# Altium PCB real man's pcb.PcbDoc
Units mm, origin at the board's own origin, x right, y up, seen from the top; angles counter-clockwise.
Board outline 85 x 80 mm, 4 copper layers (Top Layer, Gnd, DC Power, Bottom Layer), stack 1.782 mm thick; 66 components, 33 nets, 214 pads, 66 vias.
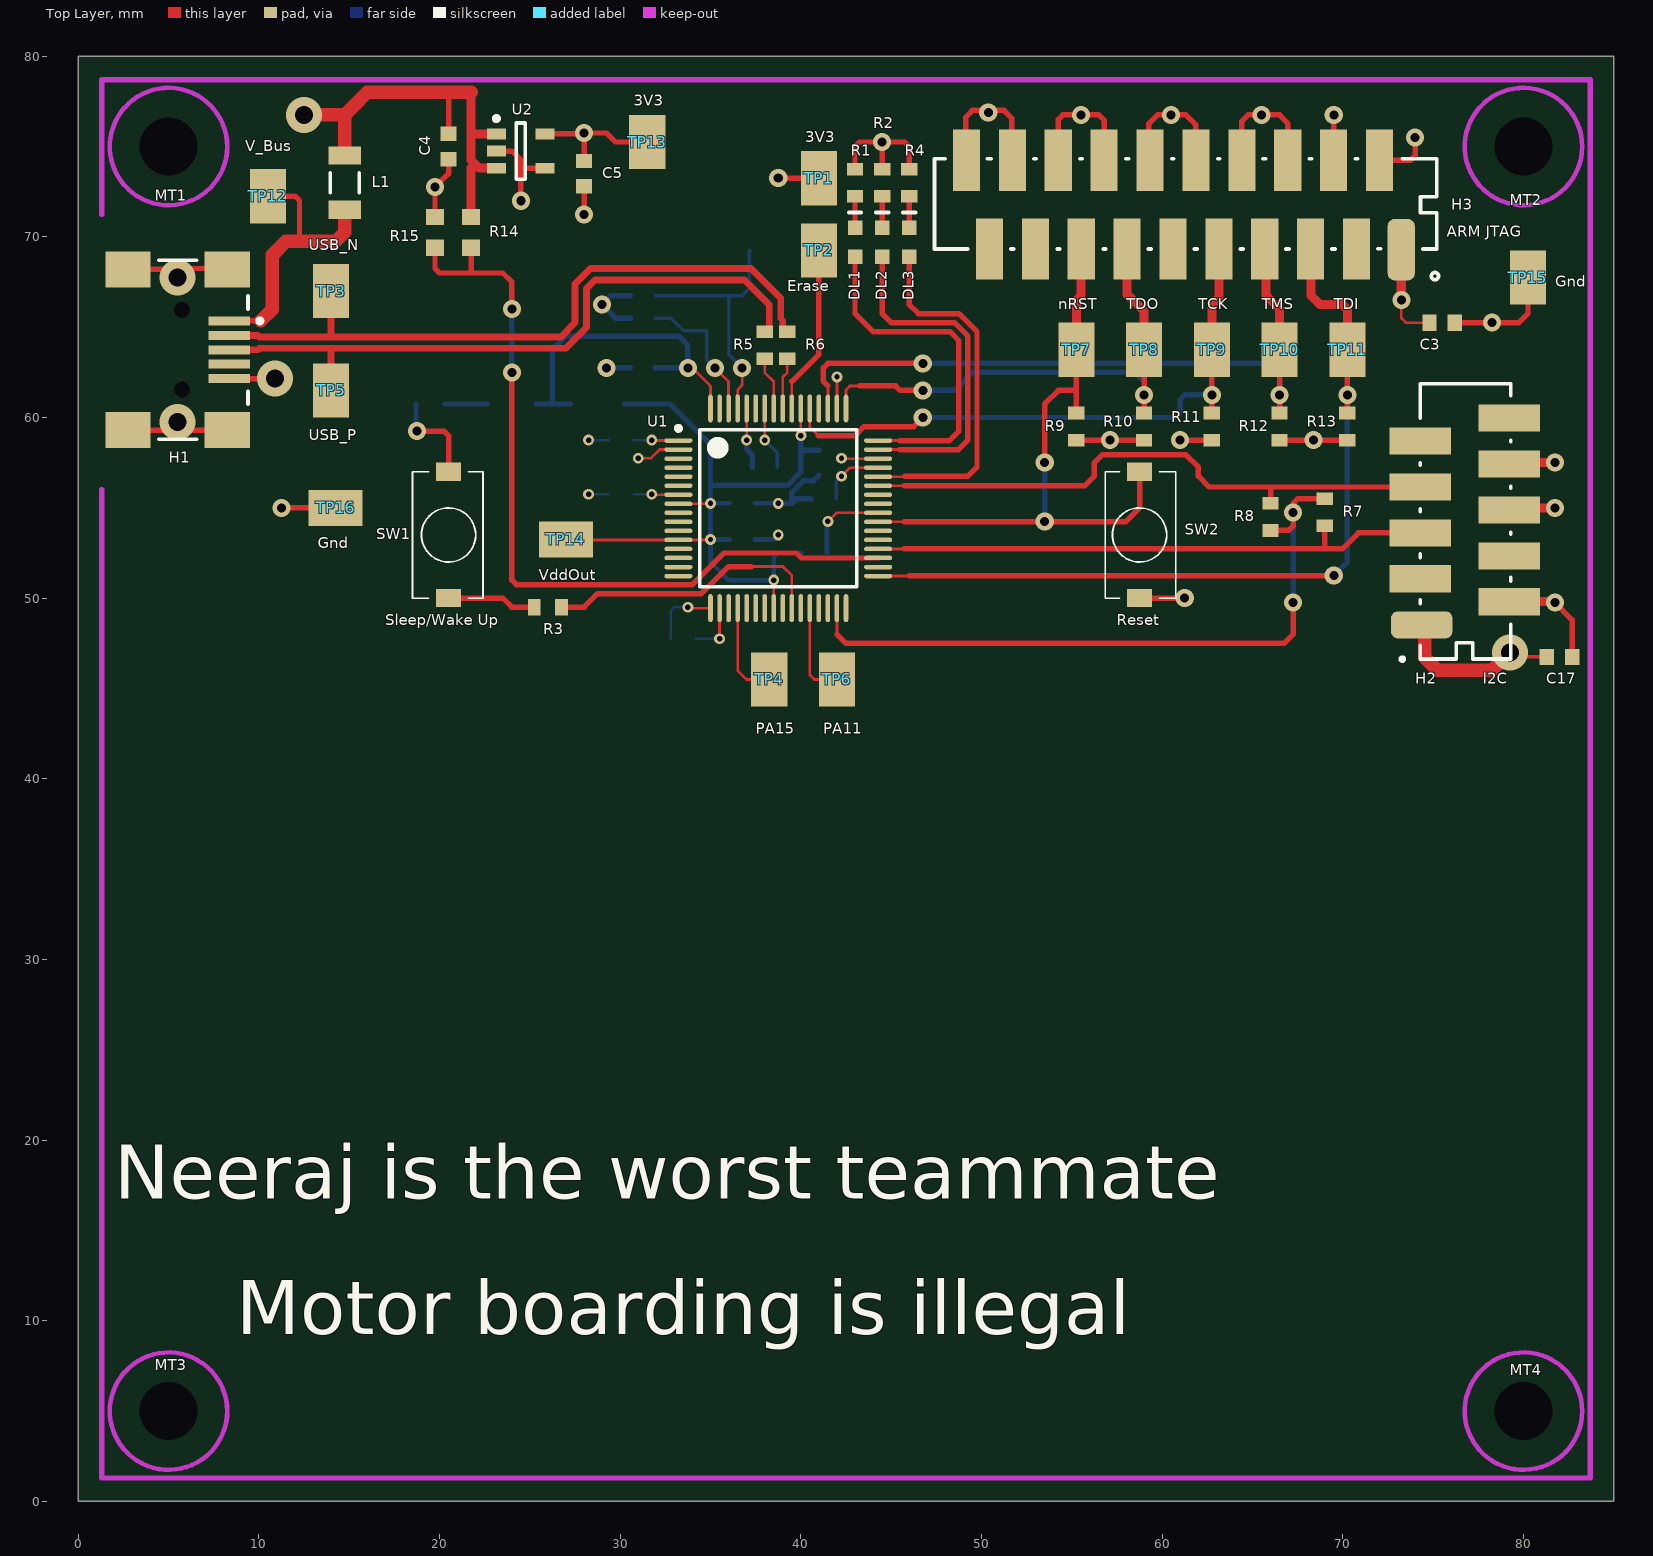
[diagram p0: Top Layer view]
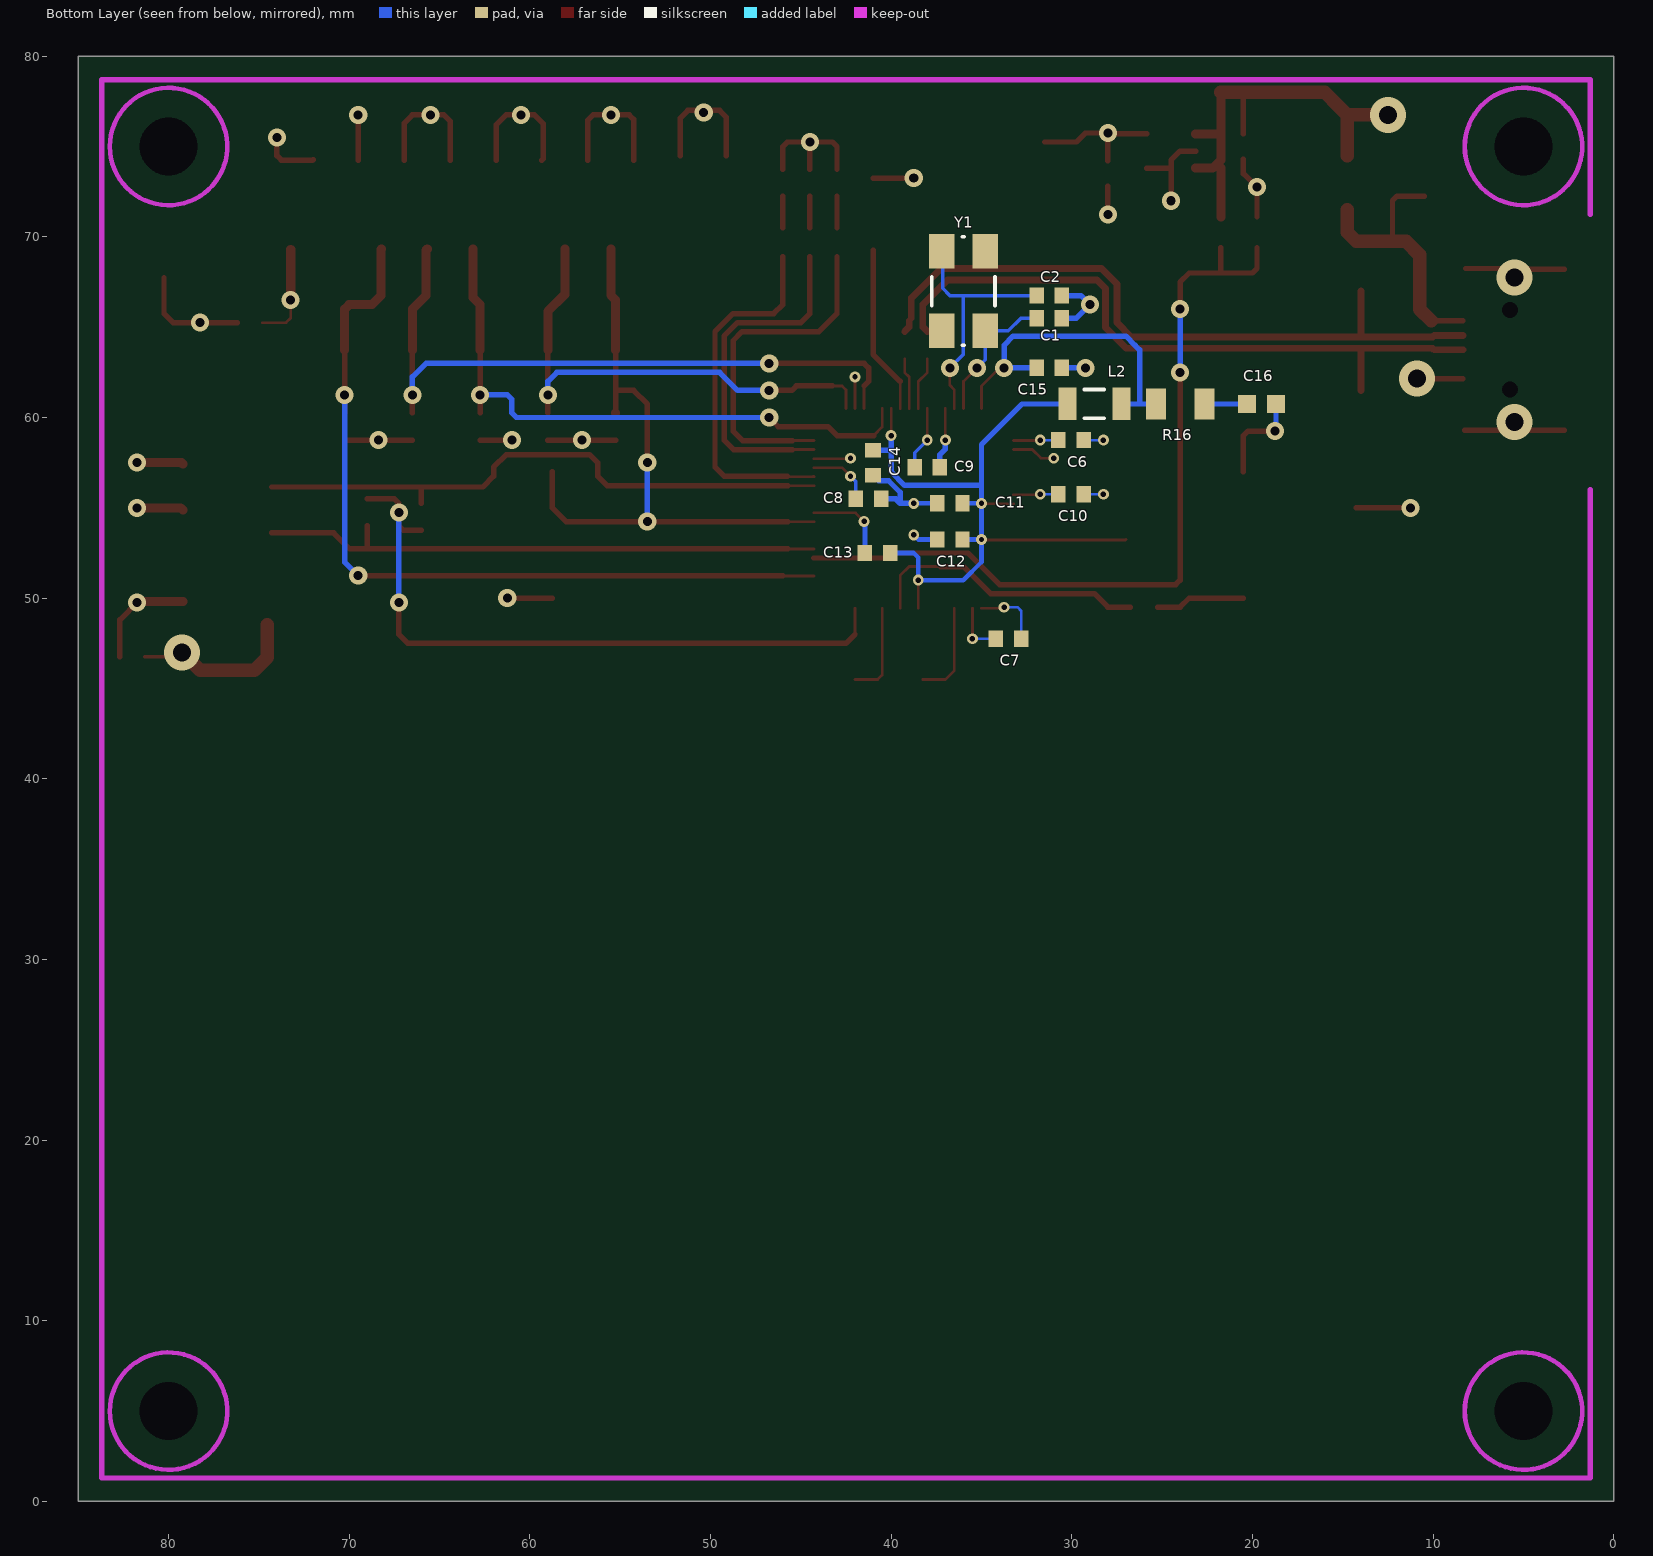
[diagram p1: Bottom Layer view, seen from below]
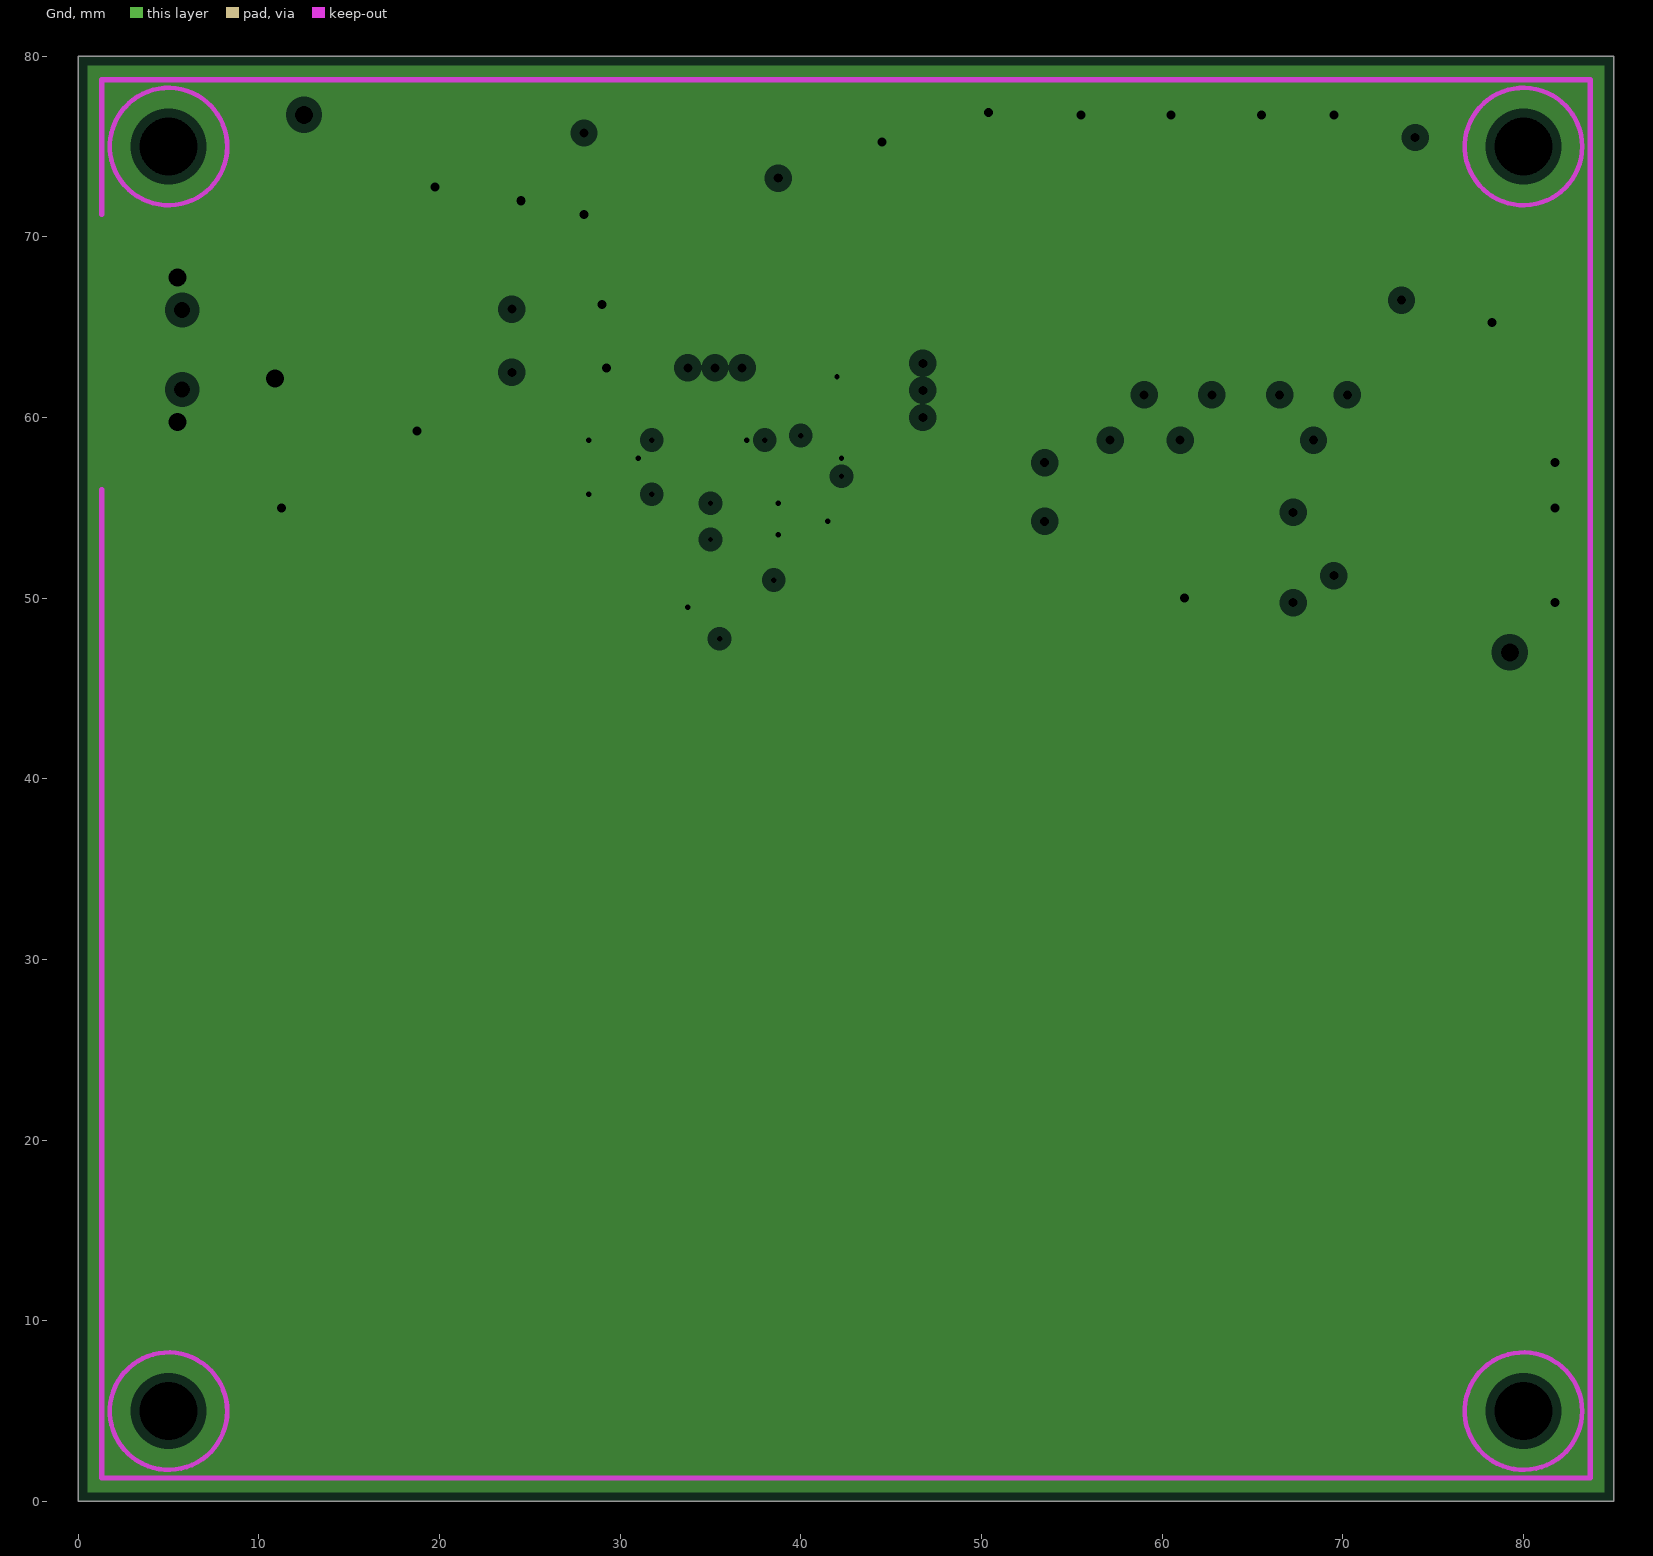
[diagram p2: Gnd, clearances drawn from the general rule]
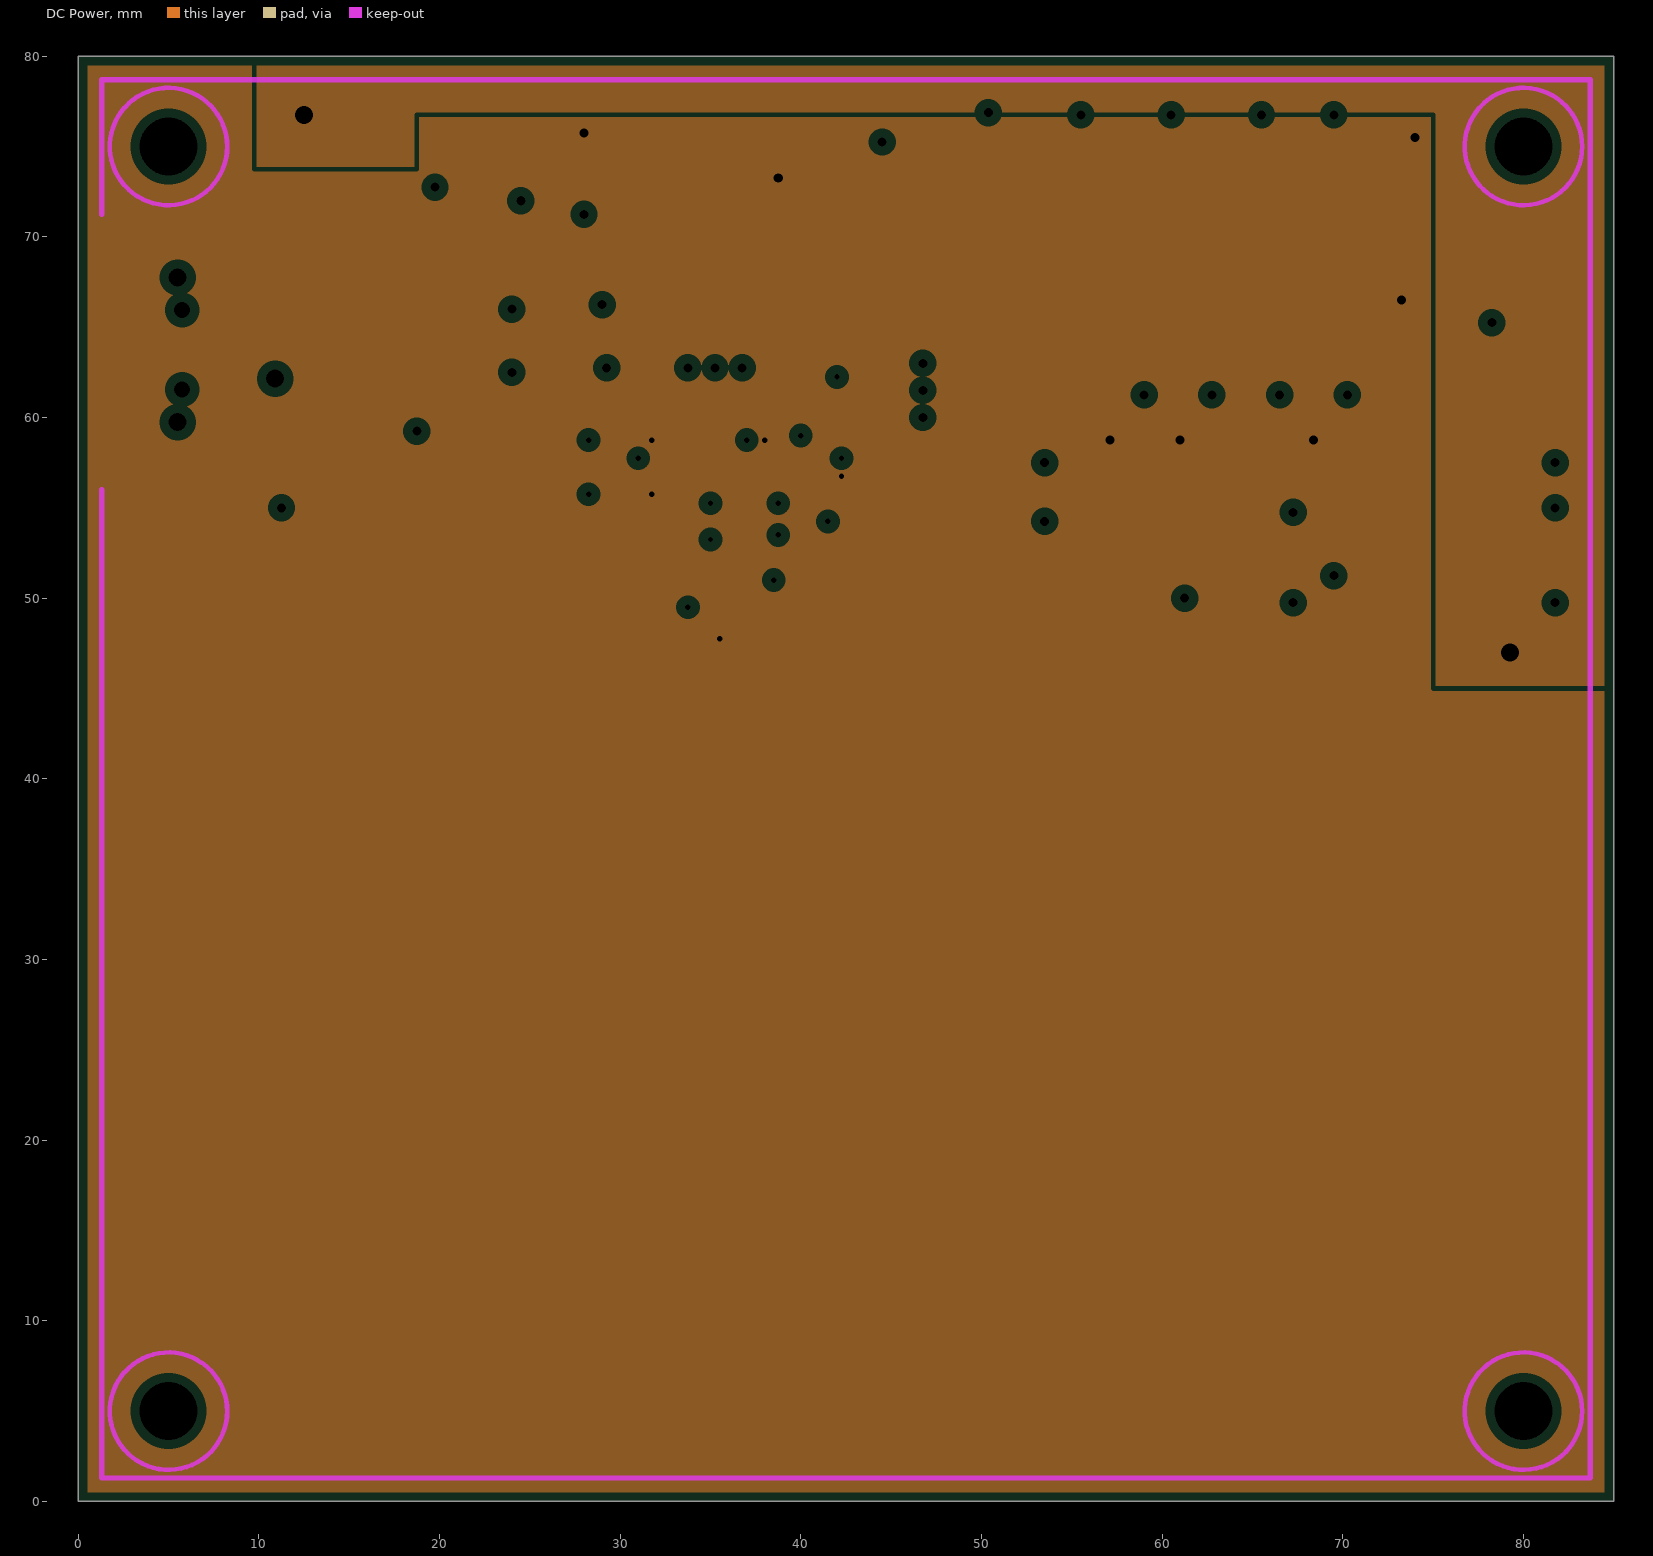
[diagram p3: DC Power, clearances drawn from the general rule]

## Layer stack, top to bottom
Top Solder: solder mask 0.0102, Solder Resist, Dk 3.5
Top Layer: signal copper 0.0356
Dielectric1: prepreg 0.32, FR-4, Dk 4.8
Gnd: plane copper 0.0356, net GND
Dielectric2: core 1, FR-4, Dk 4.8
DC Power: plane copper 0.0356, net (Multiple Nets)
Dielectric3: prepreg 0.32, FR-4, Dk 4.8
Bottom Layer: signal copper 0.0356
Bottom Solder: solder mask 0.0102, Solder Resist, Dk 3.5

## Board outline
0,0 85,0 85,80 0,80

## Design rules (kind name [scope] priority, off if disabled: settings)
Clearance Min_Clearance_Circuit_Labs [All] p1: gap=0.15
DiffPairsRouting [All] p1: maxlimit=0.254 minlimit=0.254 mostfreqgap=0.254 toplayer_minwidth=0.381 toplayer_maxwidth=0.381 toplayer_prefwidth=0.381 bottomlayer_minwidth=0.381 bottomlayer_maxwidth=0.381 bottomlayer_prefwidth=0.381 maxuncoupledlength=12.7
FanoutControl Fanout_BGA [IsBGA] p1 off: bgadir=Out bgaviamode=Centered fanoutstyle=Auto fanoutdirection=Alternating viagrid=0.025 // Fanout_BGA (Default Rule)
HoleSize [All] p1: absolutevalues=TRUE maxlimit=10 minlimit=0.3 maxpercent=80.000 minpercent=20.000
MinimumAnnularRing [All] p1: minimumring=0.1
MinimumSolderMaskSliver [All] p1 off: minsoldermaskwidth=0.25
NetAntennae [All] p1: netantennaetolerance=1
PasteMaskExpansion [All] p1 off: expansion=0.2
PlaneClearance [All] p1: clearance=0.508
PlaneConnect [All] p1: planeconnectstyle=Relief reliefexpansion=0.508 reliefentries=4 reliefconductorwidth=0.254 reliefairgap=0.254
PolygonConnect [All] p1: connectstyle=Relief reliefconductorwidth=0.254 reliefentries=4 polygonreliefangle="90 Angle" airgapwidth=0.254
RoomDefinition "Sam4S Basic Board 5" [InComponentClass('Sam4S Basic Board 5')] p1: confinementstyle=ConfineIn formatcopy=TRUE lockcomponents=FALSE outline -1.3,1.3 83.7,1.3 83.7,78.8 -1.3,78.8
RoomDefinition "Sam4S Power Distribution_5" [InComponentClass('Sam4S Power Distribution_5')] p2: confinementstyle=ConfineIn formatcopy=TRUE lockcomponents=FALSE outline 8.2,46.8 82.45,46.8 82.45,77.55 8.2,77.55
RoutingVias [All] p1: holewidth=0.5 width=1 viastyle="Through Hole" minholewidth=0.3 minwidth=0.6 maxholewidth=1 maxwidth=2
SMDNeckDown [All] p1 off: percent=50.000
SMDToCorner [All] p1: distance=98425
SMDToPlane [All] p1: distance=1968504
SilkToSolderMaskClearance SilkscreenOverComponentPads [IsPad] p1: minsilkscreentomaskgap=0.254 clearancetoexposedcopper=TRUE
SolderMaskExpansion [All] p1: expansion=0.102
ViasUnderSMD [All] p1: allowed=FALSE
Width [All] p1: maxlimit=2 minlimit=0.15 preferedwidth=0.3
21 further rules are at their usual default settings.

## Classes and differential pairs
net class C13_Nets: GND
net class C15_Nets: GND
net class R16_Nets: NetC15_2 NetC16_2 NetR16_1
net class TP4_Nets: NetTP4_1
net class TP6_Nets: NetTP6_1
net class TP15_Nets: GND
net class TP16_Nets: GND
net class C14_Nets: GND VDDOUT
net class TP14_Nets: VDDOUT
net class C3_Nets: +3V3 GND
net class C12_Nets: GND VDDOUT
net class C16_Nets: GND
net class C17_Nets: +5V GND
net class Y1_Nets: NetC1_2 NetC2_2
net class U2_Nets: +3V3 +5V GND
net class U1_Nets: +3V3 ERASE GND LED1 LED2 LED3 NetC1_2 NetC2_2 NetU1_3 NetU1_4 NetU1_5 NetU1_6 NetU1_9 NetU1_10 NetU1_11 NetU1_13 NetU1_14 NetU1_15 NetU1_16 NetU1_19 NetU1_21 NetU1_22 NetU1_23 NetU1_25 NetU1_27 NetU1_29 NetU1_30 NetU1_32 NetU1_34 NetU1_37 NetU1_38 NetU1_41 NetU1_42 NetU1_52 NetU1_59 NetU1_63 NRST SCL SDA TCK TDI TDO TMS "USB DETECT" VDDOUT
net class TP13_Nets: +3V3
net class TP11_Nets: TDI
net class TP10_Nets: TMS
net class TP9_Nets: TCK
net class TP8_Nets: TDO
net class TP7_Nets: NRST
net class TP5_Nets: USB_P
net class TP3_Nets: USB_N
net class TP2_Nets: ERASE
net class TP1_Nets: +3V3
net class SW2_Nets: GND NRST
net class SW1_Nets: GND
net class R15_Nets: GND "USB DETECT"
net class R13_Nets: +3V3 TDI
net class R12_Nets: +3V3 TMS
net class R11_Nets: +3V3 TCK
net class R10_Nets: +3V3 TDO
net class R9_Nets: +3V3 NRST
net class R4_Nets: GND NetDL3_1
net class R2_Nets: GND NetDL2_1
net class R1_Nets: GND NetDL1_1
net class L2_Nets: VDDOUT
net class L1_Nets: VBUS
net class H3_Nets: +3V3 GND NetH3_3 NetH3_11 NetH3_17 NetH3_19 NRST TCK TDI TDO TMS
net class H2_Nets: +5V GND NetH2_3 NetH2_4 NetH2_9 NetH2_10 SCL SDA
net class H1_Nets: GND NetH1_4 USB_N USB_P VBUS
net class DL3_Nets: LED3 NetDL3_1
net class DL2_Nets: LED2 NetDL2_1
net class DL1_Nets: LED1 NetDL1_1
net class C11_Nets: GND
net class C10_Nets: +3V3 GND
net class C9_Nets: GND
net class C8_Nets: GND
net class C7_Nets: +3V3 GND
net class C6_Nets: +3V3 GND
net class C5_Nets: GND
net class C4_Nets: +5V GND
net class C2_Nets: GND NetC2_2
net class C1_Nets: GND NetC1_2
component class "Sam4S Power Distribution_5": C4 C9 C10 C11 C12 C13 C14 C15 C16 L1 L2 R16 TP14 TP15 TP16 U2
component class "Sam4S Basic Board 5": C1 C2 C3 DL1 DL2 DL3 H1 H2 H3 MT1 MT2 MT3 MT4 R2 R3 R4 R6 R7 R11 SW1 SW2 TP3 TP4 TP6 TP7 TP8 TP9 U1 Y1
differential pair USB: +USB_P -USB_N

## Components (designator, comment, footprint, x,y, rotation, side; value= is the part's Value field where it differs from the comment)
C1 "10pF" CAPC1608L 31.25,65.5 r0 bottom
C2 "10pF" CAPC1608L 31.25,66.75 r0 bottom
C3 "100nF" CAPC1608L 75.5,65.25 r180 top
C4 "10uF" CAPC1608L 20.5,75 r270 top
C5 "10uF" CAPC1608L 28,73.5 r270 top
C6 "100nF" CAPC1608L 30.05,58.75 r0 bottom
C7 "100nF" CAPC1608L 33.5,47.75 r0 bottom
C8 "100nF" CAPC1608L 41.25,55.5 r0 bottom
C9 "100nF" CAPC1608L 38,57.25 r0 bottom
C10 "100nF" CAPC1608L 30.05,55.75 r0 bottom
C11 "100nF" CAPC1608L 36.75,55.25 r180 bottom
C12 "100nF" CAPC1608L 36.75,53.25 r180 bottom
C13 "100nF" CAPC1608L 40.75,52.5 r180 bottom
C14 "100nF" CAPC1608L 41,57.5 r90 bottom
C15 "100nF" CAPC1608L 31.25,62.75 r0 bottom
C16 "4.7uF" CAPC1608N 19.5,60.75 r0 bottom
C17 "100nF" CAPC1608L 82,46.75 r180 top
DL1 "Dark Green" WL-SMCW0603 43,70.5 r270 top
DL2 "Yellow" WL-SMCW0603 44.5,70.5 r270 top
DL3 "Red" WL-SMCW0603 46,70.5 r270 top
H1 "JS_USB_MINI_B" USB/SM0.8-6H5 0.5,63.75 r180 top
H2 "I2C" 188275-10 76.75,54.25 r90 top
H3 "ARM JTAG" 188275-20 61.235,71.789 r180 top
L1 "Ferrite Bead" INDC3216L 14.75,73 r90 top
L2 "Ferrite Bead" INDC3216L 28.75,60.75 r0 bottom
MT1 "M3.2 NPTH" MNT-HOLE_3.2mm_NPTH 5,75 r0 top
MT2 "M3.2 NPTH" MNT-HOLE_3.2mm_NPTH 80,75 r0 top
MT3 "M3.2 NPTH" MNT-HOLE_3.2mm_NPTH 5,5 r0 top
MT4 "M3.2 NPTH" MNT-HOLE_3.2mm_NPTH 80,5 r0 top
R1 "62R" RESC1608L 43,73 r90 top
R2 "220R" RESC1608L 44.5,73 r90 top
R3 "2K2" RESC1608L 26,49.5 r180 top
R4 "220R" RESC1608L 46,73 r90 top
R5 "27R" RESC1608L 38,64 r270 top
R6 "27R" RESC1608L 39.25,64 r270 top
R7 "2K2" RESC1608L 69,54.75 r90 top
R8 "2K2" RESC1608L 66,54.5 r270 top
R9 "100K" RESC1608L 55.25,59.5 r270 top
R10 "100K" RESC1608L 59,59.5 r270 top
R11 "100K" RESC1608L 62.75,59.5 r270 top
R12 "100K" RESC1608L 66.5,59.5 r270 top
R13 "100K" RESC1608L 70.25,59.5 r270 top
R14 "27K" RESC1608N 21.75,70.25 r90 top
R15 "47K" RESC1608N 19.75,70.25 r270 top
R16 "1R" RESC3216L 24,60.75 r0 bottom
SW1 "Sleep/Wake Up" KSR211G 20.5,50 r90 top
SW2 "Reset" KSR211G 58.75,57 r270 top
TP1 "3V3" TP_0805 41,73.25 r90 top
TP2 "Erase" TP_0805 41,69.25 r90 top
TP3 "USB_N" TP_0805 14,67 r90 top
TP4 "PA15" TP_0805 38.25,45.5 r90 top
TP5 "USB_P" TP_0805 14,61.5 r90 top
TP6 "PA11" TP_0805 42,45.5 r90 top
TP7 "nRST" TP_0805 55.25,63.75 r90 top
TP8 "TDO" TP_0805 59,63.75 r90 top
TP9 "TCK" TP_0805 62.75,63.75 r90 top
TP10 "TMS" TP_0805 66.5,63.75 r90 top
TP11 "TDI" TP_0805 70.25,63.75 r90 top
TP12 "V_Bus" TP_0805 10.5,72.25 r90 top
TP13 "3V3" TP_0805 31.5,75.25 r270 top
TP14 "VddOut" TP_0805 27,53.25 r0 top
TP15 "Gnd" TP_0805 80.25,67.75 r90 top
TP16 "Gnd" TP_0805 14.25,55 r0 top
U1 "ATSAM4S8BA-ANR" LQFP64_L 38.75,54.975 r0 top
U2 "TLV70233DBVR" SOT95P280X145-5N 24.5,74.75 r0 top
Y1 "18.432MHz" 6.0X3.5-4 36,67 r270 bottom

## Footprints (in the part's own frame and the unit in brackets; to place one, negate y for a bottom-side part, rotate by r counter-clockwise, add the part's x,y. Pads: shape width x height; smd on the part's side, far side on the other; paste and mask are expansions set on the pad)
6.0X3.5-4 [mm] "4 SMD 6.0X3.5 mm No Lead Crystal"
  rect 1.9x1.4 smd: 1(-2.2,-1.2) 2(2.2,-1.2) 3(2.2,1.2) 4(-2.2,1.2)
  silkscreen extent -3,-1.75 3,1.75, body extent -3,-1.75 3,1.75, height 1.2
188275-10 [mm] "MicroMatch Ribbon Connector 10 way"
  rrect50% 1.5x3.4 smd: 1(-5.724,2.385)
  rect 1.5x3.4 smd: 2(-4.445,-2.461) 3(-3.175,2.461) 4(-1.905,-2.461) 5(-0.635,2.461) 6(0.635,-2.461) 7(1.905,2.461) 8(3.175,-2.461) 9(4.445,2.461) 10(5.715,-2.461)
  silkscreen extent -7.74,-2.55 7.62,3.57, body extent -7.62,-2.5 7.64,2.43, height 8.45
188275-20 [mm] "MicroMatch Ribbon Connector 20 way"
  rrect50% 1.5x3.4 smd: 1(-12,2.5)
  rect 1.5x3.4 smd: 2(-10.795,-2.461) 3(-9.525,2.461) 4(-8.255,-2.461) 5(-6.985,2.461) 6(-5.715,-2.461) 7(-4.445,2.461) 8(-3.175,-2.461) 9(-1.905,2.461) 10(-0.635,-2.461) 11(0.635,2.461) 12(1.905,-2.461) 13(3.175,2.461) 14(4.445,-2.461) 15(5.715,2.461) 16(6.985,-2.461) 17(8.255,2.461) 18(9.525,-2.461) 19(10.795,2.461) 20(12.065,-2.461)
  silkscreen extent -14.06,-2.54 13.83,4.16, body extent -13.96,-2.54 13.93,2.46, height 8.45
CAPC1608L [mm] "Chip Capacitor, Body 1.6x0.8mm, IPC High Density"
  rect 0.8x0.9 smd: 1(-0.7,0) 2(0.7,0)
  body extent -0.87,-0.48 0.87,0.48, height 0.85
CAPC1608N [mm] "Chip Capacitor, Body 1.6x0.8mm, IPC Medium Density"
  rect 1x1 smd: 1(-0.8,0) 2(0.8,0)
  body extent -0.87,-0.48 0.87,0.48, height 0.85
INDC3216L [mm] "Chip Inductor, Body 3.2x1.6mm, IPC High Density"
  rect 1x1.8 smd: 1(-1.5,0) 2(1.5,0)
  silkscreen extent -0.55,-0.8 0.55,0.8, body extent -1.75,-0.95 1.75,0.95, height 1.9
KSR211G [mm] "Subminature Tactile Switch in SMT"
  rect 1x1.4 smd: 1(0,0) 2(7,0)
  silkscreen extent 0,-1.9 7,2, body extent 0,-1.9 7,2, height 4.25
LQFP64_L [mm] "Thin QFP, 64-Leads, Body 10x10mm, Pitch 0.5mm, IPC High Density"
  oval 1.55x0.25 smd mask+0.07: 1(-5.525,3.75) 2(-5.525,3.25) 3(-5.525,2.75) 4(-5.525,2.25) 5(-5.525,1.75) 6(-5.525,1.25) 7(-5.525,0.75) 8(-5.525,0.25) 9(-5.525,-0.25) 10(-5.525,-0.75) 11(-5.525,-1.25) 12(-5.525,-1.75) 13(-5.525,-2.25) 14(-5.525,-2.75) 15(-5.525,-3.25) 16(-5.525,-3.75) 33(5.525,-3.75) 34(5.525,-3.25) 35(5.525,-2.75) 36(5.525,-2.25) 37(5.525,-1.75) 38(5.525,-1.25) 39(5.525,-0.75) 40(5.525,-0.25) 41(5.525,0.25) 42(5.525,0.75) 43(5.525,1.25) 44(5.525,1.75) 45(5.525,2.25) 46(5.525,2.75) 47(5.525,3.25) 48(5.525,3.75)
  oval 0.25x1.55 smd mask+0.07: 17(-3.75,-5.525) 18(-3.25,-5.525) 19(-2.75,-5.525) 20(-2.25,-5.525) 21(-1.75,-5.525) 22(-1.25,-5.525) 23(-0.75,-5.525) 24(-0.25,-5.525) 25(0.25,-5.525) 26(0.75,-5.525) 27(1.25,-5.525) 28(1.75,-5.525) 29(2.25,-5.525) 30(2.75,-5.525) 31(3.25,-5.525) 32(3.75,-5.525) 49(3.75,5.525) 50(3.25,5.525) 51(2.75,5.525) 52(2.25,5.525) 53(1.75,5.525) 54(1.25,5.525) 55(0.75,5.525) 56(0.25,5.525) 57(-0.25,5.525) 58(-0.75,5.525) 59(-1.25,5.525) 60(-1.75,5.525) 61(-2.25,5.525) 62(-2.75,5.525) 63(-3.25,5.525) 64(-3.75,5.525)
  silkscreen extent -5.65,-4.35 4.35,4.55, body extent -5,-5 5,5, height 1.6
MNT-HOLE_3.2mm_NPTH [mm] "Mounting Hole 3.2mm non plated"
  round 0 hole 3.2 unplated: 1(0,0)
  Keep-Out Layer circle w0.254: c0,0 r3.25
RESC1608L [mm] "Chip Resistor, Body 1.6x0.8mm, IPC High Density"
  rect 0.7x0.9 smd: 1(-0.75,0) 2(0.75,0)
  body extent -0.85,-0.48 0.85,0.48, height 0.9
RESC1608N [mm] "Chip Resistor, Body 1.6x0.8mm, IPC Medium Density"
  rect 0.9x1 smd: 1(-0.85,0) 2(0.85,0)
  body extent -0.85,-0.48 0.85,0.48, height 0.6
RESC3216L [mm] "Chip Resistor, Body 3.1x1.6mm, IPC High Density"
  rect 1.1x1.7 smd: 1(-1.35,0) 2(1.35,0)
  body extent -1.68,-0.87 1.68,0.87, height 2.54
SOT95P280X145-5N [mm] "SOT23, 5-Leads, Body 2.90x2.80mm, Pitch 0.95mm, IPC Medium Density"
  rect 1.05x0.6 smd: 1(-1.35,0.95) 2(-1.35,0) 3(-1.35,-0.95) 4(1.35,-0.95) 5(1.35,0.95)
  silkscreen extent -1.47,-1.55 0.25,1.92, body extent -0.87,-1.52 0.87,1.53, height 1.45
TP_0805 [mm] "TestPoint SMD"
  rect 3x2 smd: 1(0,0)
  body extent -1.5,-1 1.5,1.1, height 1.4
USB/SM0.8-6H5 [mm] "Connector; USB2.0, Type B, SM; 5 Position; Right Angle"
  rect 2.3x0.5 smd mask+0.07: 1(-7.85,-1.6) 2(-7.85,-0.8) 3(-7.85,0) 4(-7.85,0.8) 5(-7.85,1.6)
  rect 2.5x2 smd: 6(-7.75,4.45) 7(-2.25,4.45) 8(-7.75,-4.45) 9(-2.25,-4.45)
  round 0.6 hole 0.9 unplated: MH1(-5.25,2.2) MH2(-5.25,-2.2)
  silkscreen extent -9.68,-4.95 -3.95,4.95, body extent -8.9,-4.95 0.7,4.95, height 3.9
WL-SMCW0603 [mm] "2.4 x 0.8 x 0.7mm LED"
  rect 0.8x0.8 smd: 1(0,0) 2(1.6,0)
  silkscreen extent -0.85,-0.35 -0.85,0.35

## Part data
C1 C2: library part CC_10pF_0603, "CAP CER 10pF COG/NPO 50V 0603"
C3 C6 C7 C8 C9 C10 C11 C12 C13 C14 C15 C17: library part CC_100nF_0603, "CAP CER 100nF X7R +-10% 50V 0603"
C4 C5: library part CC_10uF_0603, "CAP CER 10UF X5R +-20% 10V 0603"
C16: library part CC_4.7uF_0603, "CAP CER 4.7uF X5R +-20%  10V 0603"
DL1: library part DL_150060GS75000, "LED Dk Green 430mcd 0603 SMD"
DL2: library part DL_150060YS75000, "LED Yellow 120mcd 0603 SMD"
DL3: library part DL_150060RS75000, "LED Red 250mcd 0603 SMD"
H1: library part JS_USB_MINI_B_SMT, "USB 2.0, Right Angle, SMT, B Type, Receptacle, 5 Position,"
H2: library part JB_HDR_IDC_5X2_VERT, "IDC Header, 1,27mm, 10-Pin, Vert, SMT"
H3: library part JB_HDR_IDC_10X2_VERT, "IDC Header, 1,27mm, 20-Pin, Vert, SMT"
L1 L2: library part IN_Ferrite-Bead, "Ferrite Bead, Rdc 0.3R, Z100MHZ 600R, Imax 1A, SMD 1206"
MT1 MT2 MT3 MT4: library part MC_M3.2_HOLE, "Fixing M3.2 Mount Hole NPTH"
R1: library part RS_62R, "RES 62 OHM 1/10W 5% 0603 SMD"
R2 R4: library part RS_220R, "RES 220 OHM 1/10W 5% 0603 SMD"
R3 R7 R8: library part RS_2K2, "RES 2.2K OHM 1/10W 5% 0603 SMD"
R5 R6: library part RS_27R, "RES 27 OHM 1/10W 5% 0603 SMD"
R9 R10 R11 R12 R13: library part RS_100K, "RES 100K OHM 1/10W 5% 0603 SMD"
R14: library part RS_27K, "RES 27K OHM 1/10W 5% 0603 SMD"
R15: library part RS_47K, "RES 47.0K OHM 1/10W 5% 0603 SMD"
R16: library part RT_1R, "RES 1R OHM 1/4W 5% 1206 SMD"
SW1 SW2: library part "WS_KSR211G LFS", "SWITCH TACTILE SPST-NO SMD"
TP1 TP2 TP3 TP4 TP5 TP6 TP7 TP8 TP9 TP10 TP11 TP12 TP13 TP14 TP15 TP16: library part TP_0805, "Test Point 2.0X0.9X1.2mm SMD"
U1: library part SE_ATSAM4S16BA-MU, "IC MCU 32BIT 512KB FLASH 64LQFP"
U2: library part SV_TLV70233DBVR, "IC REG LDO 3.3V 0.3A SOT23-5"
Y1: library part XT_CRYSTAL_18.432MHz_13pF, "18.432 MHZ 4PF  6.0X3.5mm SMD"

## Via types
v1: diameter 1, hole 0.5, Top Layer to Bottom Layer, 42 vias
v2: diameter 0.6, hole 0.3, Top Layer to Bottom Layer, 19 vias
v3: diameter 2, hole 1, Top Layer to Bottom Layer, 5 vias

## Nets (pads, with @x,y where several pads share a name; then routed paths per layer and width w, separated by ;. In a path a pad name is that pad's centre, name@x,y a point inside that pad or via, vN(x,y) a via of type N, cw(c..) or ccw(c..) an arc to the next point about the centre after c; other vN are vias at no path point)
+3V3: C3.2 C5.1 C6.2 C7.2 C8.2 C9.2 C10.2 H3.1 H3.2 R9.2 R10.2 R11.2 R12.2 R13.2 TP1.1 TP13.1 U1.1 U1.7 U1.18 U1.45 U1.58 U2.5 | length 42.7
  Top Layer w0.15: v2(31.75,55.75) 31.775,55.725 U1.7 ; v2(31.75,58.75) 31.775,58.725 U1.1 ; v2(35.5,47.75) U1.18 ; v2(38,58.75) U1.58 ; v2(42.25,56.75) 42.725,57.225 U1.45 ; v1@73.235,66.515 73.235,65.515 73.5,65.25 C3.2
  Top Layer w0.3: U2.5 27.95,75.7 v1(28,75.75) ; C5.1 v1(28,75.75) ; TP13.1 29.75,75.25 29.25,75.75 v1(28,75.75) ; v1(38.75,73.25) TP1.1 ; R9.2 v1(57.125,58.75) R10.2 ; v1(61,58.75) R11.2 ; R12.2 v1(68.375,58.75) R13.2 ; H3.2@72,74.28 H3.2 73.75,74.25 74,74.5 v1(74,75.5) ; H3.1 H3.1@73.274,69.25
  Top Layer w0.5: v1@73.235,66.515 H3.1
  Bottom Layer w0.15: C10.2 v2(31.75,55.75) ; C6.2 v2(31.75,58.75) ; C7.2 v2(35.5,47.75)
  Bottom Layer w0.2: v2(38,58.75) 38.7,58.05 C9.2 ; C8.2 41.95,56.45 v2(42.25,56.75)
  other v1: 73.25,66.5
+5V: C4.1 C17.2 H2.1 L1.2 R14.2 U2.1 U2.3 | length 33.7
  Top Layer w0.2: v3(79.25,47) 79.5,46.75 C17.2
  Top Layer w0.3: C4.1 20.5,78
  Top Layer w0.5: R14.2 21.75,73.8 21.975,74.025 ; 21.75,78 21.75,75.75 ; U2.3 22.2,73.8 21.975,74.025 ; U2.1 21.8,75.7 21.75,75.75 ; 21.75,75.75 21.75,74.25 21.975,74.025
  Top Layer w0.75: v3(12.5,76.75) 14.75,76.75 ; L1.2 14.75,76 14.75,76.75 ; 21.75,78 20.5,78 16,78 15.25,77.25 14.75,76.75 ; H2.1@74.526,48.526 74.526,46.724 75.25,46 78.25,46 v3(79.25,47)
  Bottom Layer w0.75: v3(79.25,47) v3@79.5,47
ERASE: TP2.1 U1.55 | length 9.4
  Top Layer w0.15: U1.55 39.5,62
  Top Layer w0.3: 39.5,62 41,63.5 TP2.1
GND: C1.1 C2.1 C3.1 C4.2 C5.2 C6.1 C7.1 C8.1 C9.1 C10.1 C11.1 C12.1 C13.1 C14.1 C15.1 C16.1 C17.1 H1.5 H1.6 H1.7 H1.8 H1.9 H2.2 H2.6 H2.8 H3.4 H3.6 H3.8 H3.10 H3.12 H3.14 H3.16 H3.18 H3.20 R1.2 R2.2 R4.2 R15.1 SW1.2 SW2.2 TP15.1 TP16.1 U1.2 U1.17 U1.40 U1.46 U1.50 U1.60 U2.2 U2.4 | length 123.4
  Top Layer w0.15: v2(31,57.75) 31.715,57.75 32.19,58.225 U1.2 ; v2(33.75,49.5) 33.8,49.45 U1.17 ; v2(37,58.75) U1.60 ; v2(41.5,54.25) 41.975,54.725 U1.40 ; U1.50 v2(42,62.25) ; v2(42.25,57.75) 42.275,57.725 U1.46
  Top Layer w0.3: H1.7 4.8,59.3 5.25,59.75 v3(5.5,59.75) 5.75,59.75 6.2,59.3 H1.6 ; H1.9 5.05,68.2 v3(5.5,67.75) 6,68.25 H1.8@8.2,68.25 ; H1.5 v3(10.9,62.15) ; v1(11.25,55) TP16.1 ; v1(18.75,59.25) 20.25,59.25 20.5,59 SW1.2 ; R15.1 v1(19.75,72.75) 20.5,73.5 C4.2 ; U2.2 24,74.75 24.5,74.25 24.5,73.75 ; v1(24.5,72) 24.5,73.75 ; U2.4 24.55,73.8 24.5,73.75 ; v1(28,71.25) C5.2 ; R1.2 43,75 43.25,75.25 v1(44.5,75.25) ; R2.2 v1(44.5,75.25) ; R4.2 46,75 45.75,75.25 v1(44.5,75.25) ; H3.20@49.13,74.5 49.13,76.63 49.5,77 v1@50.375,77 ; v1(50.375,76.875) v1@50.375,77 ; H3.18@51.67,74.5 51.67,76.58 51.25,77 v1@50.375,77 ; H3.16 54.25,76.5 54.5,76.75 v1(55.5,76.75) 56.5,76.75 56.79,76.46 H3.14 ; SW2.2 v1(61.25,50) ; H3.12 59.25,74.33 59.25,76.25 59.75,76.75 v1(60.5,76.75) 61.32,76.75 61.87,76.2 H3.10 ; H3.8 64.41,76.41 64.75,76.75 v1(65.5,76.75) 66.5,76.75 66.95,76.3 H3.6 ; H3.4 69.49,76.74 v1(69.5,76.75) ; C3.1 v1(78.25,65.25) 79.75,65.25 80.25,65.75 TP15.1 ; v1@81.695,49.805 82.7,48.8 C17.1
  Top Layer w0.5: H2.2 v1@81.695,49.805 ; H2.6 79.326,55 v1(81.75,55) ; H2.8 79.286,57.5 v1(81.75,57.5)
  Bottom Layer w0.15: v2(28.25,55.75) C10.1 ; v2(28.25,58.75) C6.1 ; C7.1 32.8,49.3 33,49.5 v2(33.75,49.5)
  Bottom Layer w0.254: C12.1 38.5,53.25 v2(38.75,53.5) ; C11.1 v2(38.75,55.25) ; C13.1 41.45,54.2 v2(41.5,54.25)
  Bottom Layer w0.3: C16.1 18.7,59.3 v1(18.75,59.25) ; v1(29.25,62.75) C15.1 ; C1.1 29.75,65.5 v1(29,66.25) 29.5,66.75 C2.1 ; v2(37,58.75) 37,58.25 37.3,57.95 C9.1 ; v2(38.75,55.25) 39.5,55.25 ; C8.1 39.75,55.5 39.5,55.25 ; C14.1 40.7,56.5 40.136,56.5 39.5,55.864 39.5,55.25
  other v1: 81.75,49.75
LED1: DL1.2 U1.48 | length 19.2
  Top Layer w0.15: U1.48 45.475,58.725
  Top Layer w0.3: DL1.2 43,65.75 44,64.75 48.25,64.75 48.75,64.25 48.75,59.25 48.225,58.725 45.475,58.725
LED2: DL2.2 U1.47 | length 19.4
  Top Layer w0.15: U1.47 45.475,58.225
  Top Layer w0.3: DL2.2 44.5,65.75 45,65.25 48.5,65.25 49.25,64.5 49.25,58.75 48.725,58.225 45.475,58.225
LED3: DL3.2 U1.44 | length 20.2
  Top Layer w0.15: U1.44@44.3,56.75 U1.44 45.725,56.725 45.75,56.75
  Top Layer w0.3: 45.75,56.75 49.25,56.75 49.75,57.25 49.75,64.75 48.75,65.75 46.5,65.75 46,66.25 DL3.2
NetC1_2: C1.2 U1.62 Y1.3 | length 7.9
  Top Layer w0.15: v1(35.25,62.75) 36,62 U1.62
  Bottom Layer w0.2: C1.2 32.816,65.5 33.516,64.8 Y1.3 34.8,63.2 v1(35.25,62.75)
NetC2_2: C2.2 U1.61 Y1.1 | length 14.2
  Top Layer w0.15: U1.61 36.5,61.535 36.75,61.785 v1(36.75,62.75)
  Bottom Layer w0.2: C2.2 36,66.75 ; v1(36.75,62.75) 36,63.5 36,66.75 ; Y1.1 37.15,69.25 37.15,67.15 36.75,66.75 36,66.75
NetC15_2: C15.2 L2.1 R16.2 U1.64 | length 18.9
  Top Layer w0.15: v1(33.75,62.75) 34,62.75 35,61.75 U1.64
  Bottom Layer w0.3: R16.2 26.25,60.75 ; L2.1 26.25,60.75 ; C15.2 v1(33.75,62.75) 33.75,64 33.25,64.5 27,64.5 26.5,64 26.25,63.75 26.25,60.75
NetC16_2: C16.2 R16.1 | length 2.4
  Bottom Layer w0.3: C16.2 R16.1
NetDL1_1: DL1.1 R1.1 | length 1.8
  Top Layer w0.3: DL1.1 R1.1
NetDL2_1: DL2.1 R2.1 | length 1.8
  Top Layer w0.3: DL2.1 R2.1
NetDL3_1: DL3.1 R4.1 | length 1.8
  Top Layer w0.3: DL3.1 R4.1
NetR3_1: R3.1 U1.26 | length 15.7
  Top Layer w0.15: 37.25,51.75 39,51.75 39.5,51.25 U1.26
  Top Layer w0.3: R3.1 28,49.5 28.75,50.25 34.5,50.25 36,51.75 37.25,51.75
NetR3_2: R3.2 SW1.1 | length 5
  Top Layer w0.3: SW1.1 23.5,50 24,49.5 R3.2
NetR5_2: R5.2 U1.57 | length 3
  Top Layer w0.15: R5.2 38,62.5 38.5,62 U1.57
NetR6_2: R6.2 U1.56 | length 2.9
  Top Layer w0.15: U1.56 39,62.25 39.25,62.5 R6.2
NetR7_2: R7.2 R8.2 U1.31 | length 38.3
  Top Layer w0.15: 42,48 U1.31
  Top Layer w0.3: 42,48 42.5,47.5 66.75,47.5 67.25,48 v1(67.25,49.75) ; R8.2 67,53.75 67.25,54 v1(67.25,54.75) 67.25,55.25 67.5,55.5 R7.2
  Bottom Layer w0.3: v1(67.25,49.75) v1(67.25,54.75)
NetTP4_1: TP4.1 U1.20 | length 5.4
  Top Layer w0.15: U1.20 36.5,46 37,45.5 TP4.1
NetTP6_1: TP6.1 U1.28 | length 5.3
  Top Layer w0.15: U1.28 40.5,45.75 40.75,45.5 TP6.1
NRST: H3.15 R9.1 SW2.1 TP7.1 U1.39 | length 34.5
  Top Layer w0.15: U1.39 45.725,54.225
  Top Layer w0.3: 45.725,54.225 57.975,54.225 58.75,55 SW2.1 ; v1(53.5,57.5) 53.5,60.75 54.25,61.5 55.25,61.5 ; R9.1 55.25,61.5 ; TP7.1 55.25,61.5
  Top Layer w0.5: TP7.1 55.25,66.5 55.52,66.77 H3.15
  Bottom Layer w0.3: v1(53.5,54.25) v1(53.5,57.5)
SCL: H2.5 R7.1 U1.36 | length 31.7
  Top Layer w0.15: U1.36 45.725,52.725
  Top Layer w0.3: 45.725,52.725 69,52.725 ; R7.1 69,52.725 ; H2.5 70.865,53.615 69.975,52.725 69,52.725
SDA: H2.7 R8.1 U1.43 | length 33.1
  Top Layer w0.15: U1.43 45.725,56.225
  Top Layer w0.3: 45.725,56.225 55.725,56.225 56.25,56.75 56.25,57.5 56.7,57.95 61.3,57.95 62,57.25 62,56.75 62.595,56.155 H2.7 ; R8.1 66,56.155
TCK: H3.9 R11.1 TP9.1 U1.53 | length 34.1
  Top Layer w0.15: U1.53 40.5,59.465 40.965,59
  Top Layer w0.3: 40.965,59 43,59 43.5,59.5 46.25,59.5 v1(46.75,60) ; R11.1 TP9.1
  Top Layer w0.5: TP9.1 62.75,66.25 63.14,66.64 H3.9
  Bottom Layer w0.3: v1(46.75,60) 60.75,60 61,60.25 61,61 61.25,61.25 v1(62.75,61.25)
TDI: H3.5 R13.1 TP11.1 U1.33 | length 46.2
  Top Layer w0.15: U1.33 45.975,51.225 46,51.25
  Top Layer w0.3: 46,51.25 v1(69.5,51.25) ; R13.1 v1(70.25,61.25) TP11.1
  Top Layer w0.5: H3.5 68.25,69.299 68.25,66.75 68.75,66.25 70,66.25 70.25,66 TP11.1
  Bottom Layer w0.3: v1(69.5,51.25) 70.25,52 v1(70.25,61.25)
TDO: H3.13 R10.1 TP8.1 U1.49 | length 28.6
  Top Layer w0.15: U1.49 42.5,61.535 42.715,61.75 43.25,61.75
  Top Layer w0.3: 43.25,61.75 45.25,61.75 45.5,61.5 v1(46.75,61.5) ; R10.1 v1(59,61.25) TP8.1
  Top Layer w0.5: H3.13 58.06,66.81 59,65.87 TP8.1
  Bottom Layer w0.3: v1(46.75,61.5) 48.5,61.5 49.5,62.5 58.5,62.5 59,62 v1(59,61.25)
TMS: H3.7 R12.1 TP10.1 U1.51 | length 38.4
  Top Layer w0.15: U1.51 41.5,61.75
  Top Layer w0.3: 41.5,61.75 41.25,62 41.25,62.75 41.5,63 45,63 v1(46.75,63) ; R12.1 v1(66.5,61.25) TP10.1
  Top Layer w0.5: H3.7 65.75,69.259 65.75,66.75 66.5,66 TP10.1
  Bottom Layer w0.3: v1(46.75,63) 65.75,63 66.5,62.25 v1(66.5,61.25)
"USB DETECT": R14.1 R15.2 U1.35 | length 44.8
  Top Layer w0.3: R15.2 19.75,68.25 20,68 21.75,68 ; R14.1 21.75,68 ; v1(24,62.5) 24,51 24.25,50.75 34.001,50.75 34.3,51.049 ; v1(24,66) 24,67.5 23.5,68 21.75,68 ; 34.3,51.05 35.75,52.5 39.75,52.5 40.025,52.225 U1.35
  Bottom Layer w0.3: v1(24,62.5) v1(24,66)
USB_N: H1.2 R6.1 TP3.1 | length 38.4
  Top Layer w0.381: H1.2 9.94,64.55 10.023,64.468 14,64.468 ; TP3.1 14,64.468 ; 38.885,65.5 38.885,66.615 37.25,68.25 28.352,68.25 27.5,67.398 27.5,65.25 26.718,64.468 14,64.468 ; 39,65.35 39,65 R6.1
USB_P: H1.3 R5.1 TP5.1 | length 37.1
  Top Layer w0.381: H1.3 9.94,63.75 10.023,63.833 14,63.833 ; TP5.1 14,63.833 ; R5.1 38.25,65 38.25,65.35 ; 38.25,65.5 38.25,66.25 36.885,67.615 28.615,67.615 28.135,67.135 28.135,64.987 26.981,63.833 14,63.833
VBUS: H1.1 L1.1 TP12.1 | length 15.5
  Top Layer w0.3: H1.1 10.1,65.35 ; TP12.1 12,72.25 12.25,72 12.25,69.75
  Top Layer w0.75: 10.1,65.35 10.75,66 10.75,69 11.5,69.75 12.25,69.75 14.25,69.75 14.75,70.25 L1.1
VDDOUT: C11.2 C12.2 C13.2 C14.2 L2.2 TP14.1 U1.8 U1.12 U1.24 U1.54 | length 42.3
  Top Layer w0.15: TP14.1 27.025,53.225 U1.12 v2@34.975,53.225 ; U1.8 v2@34.975,55.225 ; U1.24 v2(38.5,51) ; v2(40,59) U1.54
  Top Layer w0.254: v2@34.975,53.225 v2(35,53.25) ; v2@34.975,55.225 v2(35,55.25)
  Bottom Layer w0.254: C12.2 v2(35,53.25) ; C11.2 v2(35,55.25) v2(35,53.25) ; C13.2 38.75,52.5 38.5,52.25 v2(38.5,51) 36,51 35,52 v2(35,53.25)
  Bottom Layer w0.3: L2.2 32.75,60.75 35,58.5 35,56.25 ; v2(35,55.25) 35,56.25 ; v2(40,59) 40,58.25 ; C14.2 40.05,58.2 40,58.25 ; 35,56.25 39.25,56.25 40,57 40,58.25
pads on no net: H1.4 H1.MH1 H1.MH2 H2.3 H2.4 H2.9 H2.10 H3.3 H3.11 H3.17 H3.19 MT1.1 MT2.1 MT3.1 MT4.1 U1.3 U1.4 U1.5 U1.6 U1.9 U1.10 U1.11 U1.13 U1.14 U1.15 U1.16 U1.19 U1.21 U1.22 U1.23 U1.25 U1.27 U1.29 U1.30 U1.32 U1.34 U1.37 U1.38 U1.41 U1.42 U1.52 U1.59 U1.63 Y1.2 Y1.4

## Polygon pours and split planes (outlines as drawn)
GND on Gnd (split plane): 84.49,0.51 0.51,0.51 0.51,79.49 84.49,79.49
+5V on DC Power (split plane): 84.49,45.129 75.129,45.129 75.129,76.75 75.12,76.8 75.092,76.842 75.05,76.87 75,76.879 18.75,76.879 18.7,76.87 18.658,76.842 18.63,76.8 18.621,76.75 18.621,73.879 9.879,73.879 9.879,79.49 84.49,79.49
+3V3 on DC Power (split plane): 9.621,73.75 9.63,73.7 9.658,73.658 9.7,73.63 9.75,73.621 18.75,73.621 18.8,73.63 18.842,73.658 18.87,73.7 18.879,73.75 18.879,76.621 74.871,76.621 74.871,45 74.88,44.95 74.908,44.908 74.95,44.88 75,44.871 84.49,44.871 84.49,0.51 0.51,0.51 0.51,79.49 9.621,79.49

## Keep-outs
Keep-Out Layer:
  lines w0.3: 1.3,56 1.3,1.3 83.7,1.3 83.7,78.7 1.3,78.7 1.3,71.25

## Other copper
DC Power (plane layer: these items are gaps in the copper):
  lines w0.254: 9.75,80 9.75,73.75 18.75,73.75 18.75,76.75 75,76.75 75,45 85,45

## Silkscreen, mask and mechanical layers (free items; w line width, h text height)
Top Overlay:
  text "Neeraj is the worst teammate" at 2,16.75 h3
  text "Motor boarding is illegal" at 8.75,9.25 h3
PCB Boundary:
  the board outline again, w0.3
Drill Drawing:
  text ".LEGEND" at 90.08,5.08 h1.52
  text "Drill Drawing." at 90.08,2.54 h1.52

## Dimensions
0,0 to 85,0 on Dimension
0,0 to 0,80 on Dimension

## Text inside footprints (layer, text, board x,y; h text height)
H1: Dimension "PCB Edge" at 0.068,67.786 h0.25 r270